# Altium PCB CT310高端控制盒基板电路V1.0.PcbDoc (part 7 of 8)
Units mil, origin at the board's own origin, x right, y up, seen from the top; angles counter-clockwise.
Board outline 8162.61 x 6196.81 mil, 2 copper layers (Top Layer, Bottom Layer), stack 65.792 mil thick; 265 components, 178 nets, 926 pads, 298 vias.
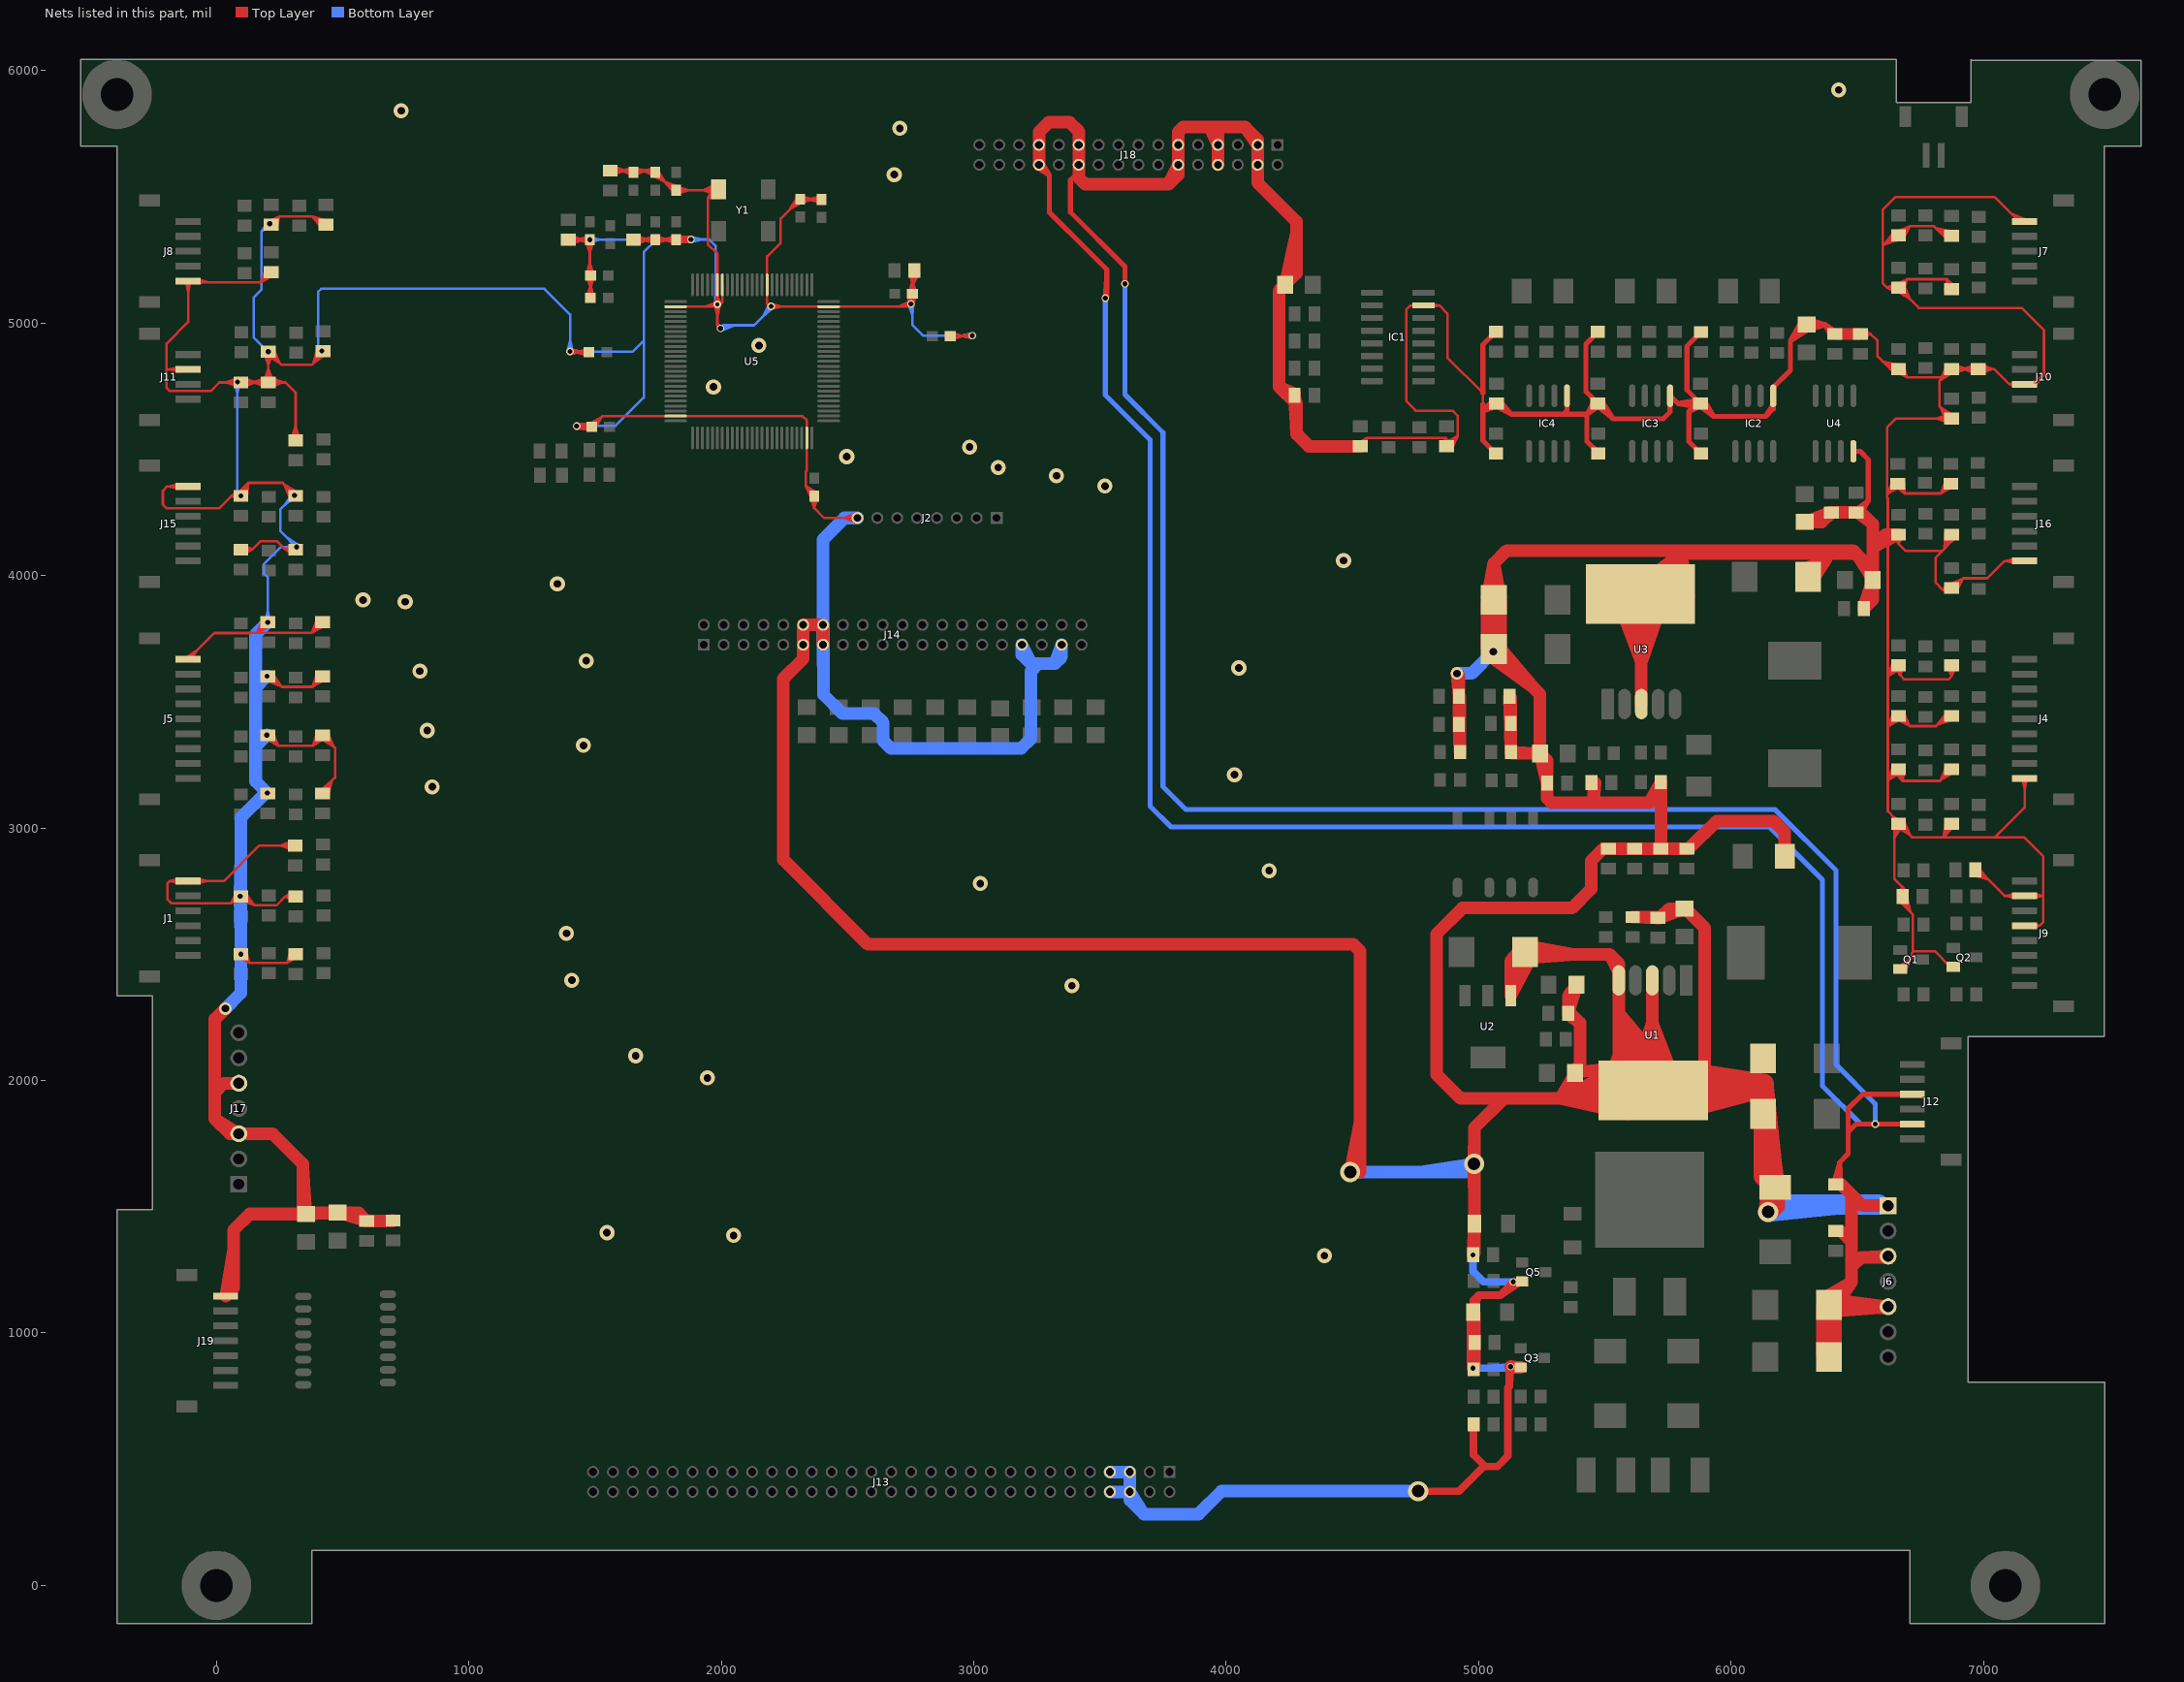
[diagram p7: the nets of this part, all layers, seen from the top]

## Via types
v1: diameter 30, hole 20, Top Layer to Bottom Layer, tented both sides, 226 vias
v2: diameter 60, hole 30, Top Layer to Bottom Layer, tented both sides, 32 vias
v3: diameter 50, hole 30, Top Layer to Bottom Layer, tented both sides, 20 vias
v4: diameter 80, hole 50, Top Layer to Bottom Layer, tented both sides, 10 vias
v5: diameter 50, hole 28, Top Layer to Bottom Layer, tented both sides, 8 vias
v6: diameter 24, hole 16, Top Layer to Bottom Layer, tented both sides, 1 vias
v7: diameter 30, hole 16, Top Layer to Bottom Layer, tented both sides, 1 vias

## Nets (pads, with @x,y where several pads share a name; then routed paths per layer and width w, separated by ;. In a path a pad name is that pad's centre, name@x,y a point inside that pad or via, vN(x,y) a via of type N, cw(c..) or ccw(c..) an arc to the next point about the centre after c; other vN are vias at no path point) (continued)
SGND: C1.2 C2.1 C3.1 C4.2 C5.1 C6.2 C7.2 C8.2 C9.1 C10.1 C11.1 C12.1 C13.1 C14.1 C15.2 C16.2 C17.2 C18.2 C19.2 C20.2 C21.1 C22.1 C23.2 C24.2 C25.2 C26.2 C27.2 C28.2 C29.2 C30.2 C31.2 C32.2 C33.2 C34.2 C35.2 C36.2 C37.2 C38.2 C39.2 C40.2 C41.2 C42.2 C43.2 C44.2 C45.2 C46.2 C47.2 C48.2 C49.2 C50.2 C51.2 C52.2 C53.2 C54.2 C55.2 C56.2 C57.2 C58.2 C59.2 C60.2 C61.2 C62.2 C63.2 C64.2 C65.2 C66.2 C67.2 C68.1 C69.2 C70.2 C71.2 C72.2 C73.2 C74.1 C75.1 C76.2 C77.2 C78.2 C79.1 C80.1 C81.1 C82.1 C83.1 C84.1 C85.2 C86.2 C89.2 C90.2 C91.2 C92.1 C93.1 C94.2 C95.1 C96.2 C97.2 C98.2 C99.1 C100.2 C101.1 C102.2 C103.1 C104.2 C107.2 C109.2 C111.2 C112.1 C113.1 C114.1 C115.1 D4.1 D5.1 D6.1 D7.1 IC1.15 IC2.5 IC3.5 IC4.5 J1.6 J2.8 J4.9 J5.9 J6.1 J6.3 J6.5 J7.1 J8.1 J9.2 J9.4 J10.3 J11.3 J12.3 J12.5 J13.5 J13.6 J13.7 J13.8 J14.11 J14.12 J14.13 J14.14 J14.33 J14.37 J15.6 J16.6 J17.3 J17.5 J18.3 J18.4 J18.7 J18.8 J18.11 J18.12 J18.21 J18.22 J18.25 J18.26 J19.7 Q1.2 Q2.2 Q3.2 Q5.2 R1.2 R3.1 R11.1 R19.1 R27.1 R28.1 R36.2 R37.2 R97.2 R98.1 R99.1 R104.2 R105.2 R106.2 R107.2 R110.2 R113.2 U1.0 U1.3 U1.5 U2.1 U3.0 U3.3 U4.4 U5.10 U5.19 U5.20 U5.27 U5.49 U5.74 U5.99 Y1.2 | length 176280.4
  Top Layer w10: J1.6@-148.39,2781.27 -185.01,2789.99 ; J1.6@-148.39,2798.71 -185.01,2789.99 ; J15.6@-148.25,4344.2 -191.15,4352.93 ; J15.6@-148.25,4361.67 -191.15,4352.93 ; J11.3@-148.25,4807.48 -191.15,4816.22 ; J11.3@-148.25,4824.95 -191.15,4816.22 ; J1.6@-147.37,2789.99 -185.01,2789.99 ; J15.6@-147.37,4352.93 -191.15,4352.93 ; J11.3@-147.37,4816.22 -191.15,4816.22 ; J8.1@-120.67,5165.3 -111.93,5122.41 J8.1@-103.2,5165.3 ; J5.9@-117.57,3675.25 -76.94,3703.51 J5.9@-105.2,3662.88 ; J5.9@-111.93,3668.52 -8.45,3772 134,3772 134.55,3772.55 161.53,3772.55 ; J15.6@-111.93,4352.93 -194.07,4352.93 -212,4335 -212,4281 -197,4266 11,4266 60.6,4315.6 ; J11.3@-111.93,4816.22 -197.22,4816.22 ; J8.1@-76.59,5157.41 -32.54,5161.37 ; J1.6@-76.5,2789.99 -32.72,2789.99 ; J8.1@-76.5,5166.19 -32.54,5161.37 ; J1.6@-75.62,2781.25 -32.72,2789.99 ; J1.6@-75.62,2798.72 -32.72,2789.99 ; J8.1@-74.68,5174.77 -32.54,5161.37 ; C67.2@74.95,4762.75 C67.2@88.19,4746.33 ; C67.2@75.54,4772.34 C67.2@88.19,4783 ; C30.2@76.92,2740.59 57,2701 ; C67.2@83.38,4757.02 38.58,4764.79 ; C67.2@84,4764.67 11.67,4764.67 -22.62,4730.38 -184.38,4730.38 -197.22,4743.22 -197.22,4816.22 ; C30.2@84.54,2726.77 C30.2@94.75,2712.34 ; C30.2@85.37,2735.05 57,2701 ; C67.2@85.4,4757.1 C67.2@103.23,4764.67 ; C67.2@85.59,4776.87 129.97,4764.67 ; C67.2@85.62,4776.87 129.11,4764.67 ; C30.2@85.7,2724.43 C30.2@99.85,2712.31 ; C58.2@85.79,4297.85 60.6,4315.6 ; C58.2@85.79,4333.35 60.6,4315.6 ; C58.2@87.69,4325.86 126,4367 ; C67.2@87.73,4776.28 C67.2@103.23,4764.67 ; C30.2@88.82,2721.44 135.47,2699.06 ; C58.2@88.91,4321.01 120.82,4361.44 ; C58.2@89.07,4321.25 119.86,4357.43 ; C30.2@89.29,2721.18 134.39,2702.76 ; C58.2@89.27,4321.53 121.54,4356.93 ; C58.2@89.31,4321.58 124.06,4359.8 ; C30.2@89.8,2720.92 135.67,2705.2 ; C30.2@90.06,2720.81 139.91,2704.91 ; C58.2@90.21,4307.07 60.6,4315.6 ; C58.2@90.21,4324.14 60.6,4315.6 ; C67.2@90.73,4756.07 37.8,4764.67 ; C67.2@90.73,4773.26 37.8,4764.67 ; C30.2@91.42,2728.92 57,2701 ; C58.2@91.42,4315.6 60.6,4315.6 ; C67.2@91.42,4764.67 37.8,4764.67 ; C28.2@91.53,2485.93 131,2466 ; C67.2@93.99,4766.6 C67.2@88.19,4746.33 ; C67.2@93.99,4767.51 C67.2@88.19,4783 ; C30.2@94,2728.92 84.92,2728.92 57,2701 ; C58.2@95.64,4319.69 126,4367 ; C30.2@95.78,2720.16 C30.2@116.08,2728.92 ; C30.2@96.18,2721.72 57,2701 ; C30.2@96.74,2739.62 C30.2@116.08,2728.92 ; C28.2@97.08,2494.37 131,2466 ; C30.2@97.33,2728.92 C30.2@116.08,2728.92 ; C52.2@97.33,4102.6 141.99,4102.6 ; C58.2@97.33,4338.33 126,4367 ; C67.2@97.33,4764.67 C69.2@205.65,4764.67 ; C30.2@98.67,2721.6 151,2694 ; C30.2@99.61,2738.28 139.91,2704.91 ; C30.2@99.97,2738.02 135.67,2705.2 ; C30.2@100.41,2737.67 134.39,2702.76 ; C30.2@100.73,2737.4 135.47,2699.06 ; C28.2@103.23,2500.42 131,2466 ; C30.2@103.23,2728.92 151,2694 ; C52.2@103.23,4102.6 141.99,4102.6 ; C58.2@103.23,4315.6 126,4367 ; C30.2@103.7,2727.58 C30.2@94.75,2712.34 ; C67.2@103.92,4756.07 156.85,4764.67 ; C67.2@103.92,4773.26 156.85,4764.67 ; C30.2@103.99,2730.48 C30.2@99.85,2712.31 ; C52.2@104.19,4094.03 141.99,4102.6 ; C52.2@104.19,4111.17 141.99,4102.6 ; C58.2@106.34,4311.28 124.06,4359.8 ; C58.2@106.43,4311.48 121.54,4356.93 ; C67.2@106.46,4746.33 156.85,4764.67 ; C67.2@106.46,4783 156.85,4764.67 ; C58.2@106.58,4311.81 119.86,4357.43 ; C58.2@106.63,4311.93 120.82,4361.44 ; C52.2@107.7,4084.52 141.99,4102.6 ; C52.2@107.7,4120.68 141.99,4102.6 ; C30.2@108.81,2735.49 151,2694 ; C28.2@110.44,2505.15 131,2466 ; C58.2@111.36,4312.73 126,4367 ; C30.2@116.45,2742.03 151,2694 ; C28.2@119.86,2508.79 131,2466 ; C58.2@121.27,4310.98 126,4367 ; C47.2@181.79,3824.27 161.53,3772.55 ; C69.2@187.31,4767.9 205.65,4818.29 ; C46.2@190.15,3366.27 C46.2@197.69,3352.25 ; C47.2@190.79,3819.76 161.53,3772.55 ; C39.2@191.28,3598.67 C39.2@200.02,3583.67 ; C46.2@193.51,3360.39 237.54,3329.42 ; C46.2@193.76,3360.19 236.52,3332.42 ; C46.2@193.91,3360.07 236.99,3333.26 ; C46.2@194.02,3359.99 238.18,3333.24 ; C46.2@194.12,3359.91 240.87,3332.13 ; C39.2@195.27,3592.81 241.07,3566.85 ; C24.2@195.68,4886.09 204.54,4840.15 ; C62.2@195.69,5211.37 177.09,5161.37 ; C39.2@195.73,3592.5 240.13,3570.88 ; C24.2@195.73,4885.62 206.76,4840.15 ; C47.2@195.8,3820.86 166.22,3775.26 ; C47.2@195.85,3820.92 167.59,3777.71 ; C47.2@195.92,3821.01 167.44,3778.45 C47.2@210,3806.94 ; C47.2@196,3821.11 166.75,3778.62 ; C47.2@196.1,3821.23 164.34,3777.08 ; C39.2@196.25,3592.2 241.62,3573.4 ; C39.2@196.51,3592.07 244.44,3573.56 ; C69.2@196.51,4746.33 146.12,4764.67 ; C69.2@196.51,4783 146.12,4764.67 ; C39.2@196.56,3592.04 245.7,3573.29 ; C69.2@197.06,4765.36 205.65,4818.29 ; C24.2@197.06,4886.23 205.65,4833.3 ; C47.2@197.74,3814.67 161.53,3772.55 ; C24.2@198.95,4879.5 242.62,4846.82 ; C69.2@199.05,4756.07 146.12,4764.67 ; C69.2@199.05,4773.26 146.12,4764.67 ; C24.2@199.16,4879.31 241.55,4849.78 ; C24.2@199.3,4879.2 241.86,4850.71 C24.2@213.38,4893.27 ; C24.2@199.42,4879.1 242.72,4851.03 ; C24.2@199.53,4879.01 245.58,4849.75 ; C24.2@199.58,4872.66 250.48,4842.09 ; C69.2@199.74,4764.67 146.12,4764.67 ; C46.2@200.8,3377.97 C46.2@216.52,3371.69 ; C24.2@201.33,4895.95 C24.2@187.31,4883.69 ; C39.2@203.13,3591.23 C39.2@218.33,3599.67 ; C46.2@203.47,3360.49 245.25,3325 ; C46.2@203.65,3366.6 245.25,3325 ; C47.2@203.83,3808.55 161.53,3772.55 ; C39.2@204.56,3592.64 258.13,3559.87 ; C39.2@204.6,3610.33 C39.2@218.33,3599.67 ; C24.2@204.68,4876.97 C24.2@187.31,4883.69 ; C62.2@204.76,5206.98 177.09,5161.37 ; C46.2@204.96,3359.32 C46.2@216.52,3371.69 ; C24.2@205.47,4880.81 250.48,4842.09 ; C24.2@206.62,4876.97 C24.2@223.99,4883.69 ; C39.2@207.05,3608.96 245.7,3573.29 ; C39.2@207.14,3608.89 244.44,3573.56 ; C46.2@207.26,3374.88 240.87,3332.13 ; C46.2@207.42,3374.71 238.18,3333.24 ; C39.2@207.43,3608.66 241.62,3573.4 ; C46.2@207.53,3374.58 236.99,3333.26 ; C46.2@207.65,3374.44 236.52,3332.42 ; C46.2@207.78,3374.28 237.54,3329.42 ; C39.2@207.87,3608.27 240.13,3570.88 ; C39.2@208.18,3607.96 241.07,3566.85 ; C46.2@208.94,3363.51 C46.2@197.69,3352.25 ; C46.2@209.55,3366.6 245.25,3325 ; C39.2@209.55,3599.67 258.13,3559.87 ; C47.2@209.63,3800.33 161.53,3772.55 ; C47.2@209.87,3806.83 164.34,3777.08 ; C47.2@209.91,3806.87 166.75,3778.62 ; C24.2@209.97,4895.95 C24.2@223.99,4883.69 ; C47.2@210.1,3807.02 167.59,3777.71 ; C47.2@210.24,3807.14 166.22,3775.26 ; C39.2@210.4,3597.58 C39.2@200.02,3583.67 ; C69.2@211.55,4764.67 265.18,4764.67 ; C24.2@211.55,4886.93 250.48,4842.09 ; C62.2@211.74,5201.93 177.09,5161.37 ; C59.2@212.1,5404.61 250.33,5422.61 ; C69.2@212.25,4756.07 265.18,4764.67 ; C69.2@212.25,4773.26 265.18,4764.67 ; C24.2@213.11,4893.59 245.58,4849.75 ; C24.2@213.27,4893.4 242.72,4851.03 ; C24.2@213.48,4893.15 241.55,4849.78 ; C24.2@213.59,4893 242.62,4846.82 ; C69.2@214.24,4765.36 205.65,4818.29 ; C24.2@214.24,4886.23 205.65,4833.3 ; C69.2@214.79,4746.33 265.18,4764.67 ; C69.2@214.79,4783 265.18,4764.67 ; C39.2@215.46,3605.94 258.13,3559.87 ; C24.2@215.56,4885.62 204.54,4840.15 ; C24.2@215.61,4886.09 206.76,4840.15 ; C59.2@217.48,5396.04 250.33,5422.61 ; C62.2@217.65,5201.93 177.09,5161.37 ; C59.2@217.65,5389.93 250.33,5422.61 ; C62.2@217.83,5195.81 177.09,5161.37 ; C24.2@218.46,4892.09 250.48,4842.09 ; C39.2@223.36,3612.16 258.13,3559.87 ; C62.2@223.57,5187.54 177.09,5161.37 ; C59.2@223.55,5389.93 250.33,5422.61 ; C69.2@223.99,4767.9 205.65,4818.29 ; C46.2@225.54,3376.15 245.25,3325 ; C24.2@227.36,4896.78 250.48,4842.09 ; C59.2@230.75,5385.17 250.33,5422.61 ; C59.2@240.21,5381.59 250.33,5422.61 ; C27.2@291.57,2509.05 279.56,2466 ; C61.2@295.64,4538.33 313.97,4588.72 ; C55.2@300.88,4311.16 273.41,4357.87 ; C27.2@300.93,2505.25 279.56,2466 ; C55.2@300.9,4311.14 275.09,4355.32 ; C55.2@300.96,4311.06 275.06,4354.52 ; C55.2@301.03,4310.97 274.75,4353.98 ; C55.2@301.16,4310.44 269.14,4360.44 ; C55.2@301.16,4310.79 272.92,4354.53 ; C55.2@301.21,4310.73 270.78,4356.54 ; C55.2@301.54,4323.66 C55.2@292.26,4305.75 ; C31.2@302.84,2912.33 252.45,2930.67 ; C31.2@302.84,2949 252.45,2930.67 ; C29.2@303.09,2710.97 273.25,2728.92 ; C29.2@303.09,2746.86 273.25,2728.92 ; C49.2@303.09,4084.66 273.25,4102.6 ; C49.2@303.09,4120.55 273.25,4102.6 ; C31.2@305.38,2922.07 252.45,2930.67 ; C31.2@305.38,2939.26 252.45,2930.67 ; C61.2@305.38,4535.79 313.97,4588.72 ; C31.2@306.07,2930.67 252.45,2930.67 ; C29.2@307,2720.36 273.25,2728.92 ; C29.2@307,2737.47 273.25,2728.92 ; C49.2@307,4094.05 273.25,4102.6 ; C49.2@307,4111.16 273.25,4102.6 ; C27.2@308.07,2500.42 279.56,2466 ; C29.2@308.07,2728.92 273.25,2728.92 ; C49.2@308.07,4102.6 273.25,4102.6 ; C55.2@308.07,4315.6 269.14,4360.44 ; C55.2@310.79,4318.79 262.57,4367 126,4367 ; C31.2@311.97,2930.67 170.67,2930.67 29.99,2789.99 J1.6@-111.93,2789.99 -185.01,2789.99 ; C55.2@312.35,4307.58 C55.2@292.26,4305.75 ; C27.2@313.97,2500.42 279.56,2466 ; C29.2@313.97,2728.92 273.25,2728.92 ; C49.2@313.97,4102.6 273.25,4102.6 ; C61.2@313.97,4535.1 313.97,4724.03 273.33,4764.67 C69.2@205.65,4764.67 ; C27.2@314.15,2494.3 279.56,2466 ; C55.2@314.15,4321.71 269.14,4360.44 ; C55.2@315.63,4324.49 274.75,4353.98 ; C55.2@315.72,4324.41 275.06,4354.52 ; C55.2@315.81,4324.33 275.09,4355.32 ; C55.2@315.9,4324.23 273.41,4357.87 ; C27.2@319.62,2485.81 279.56,2466 ; C55.2@320.04,4329.87 269.14,4360.44 ; C61.2@322.57,4535.79 313.97,4588.72 ; C61.2@332.31,4538.33 313.97,4588.72 ; C42.2@397.91,3375.27 382,3325 ; C35.2@398.34,3609.12 379.63,3559 ; C43.2@398.43,3824.27 378.18,3772.55 ; C42.2@407.18,3371.33 382,3325 ; C35.2@407.41,3604.72 379.63,3559 ; C43.2@407.44,3819.76 378.18,3772.55 ; C26.2@408.96,4892.3 383.5,4840.5 ; C26.2@409.19,4893.73 389.52,4846.52 ; C26.2@409.31,4893.95 389.83,4849.62 ; C26.2@409.47,4894.22 387.62,4848.89 ; C26.2@409.57,4894.37 385.43,4847.17 ; C34.2@412.03,3148.68 456.37,3186.37 ; C26.2@412.22,4880.84 C26.2@399.58,4895.93 ; C42.2@414.23,3352.34 465.13,3321.77 ; C42.2@414.39,3366.6 382,3325 ; C35.2@414.39,3599.67 379.63,3559 ; C43.2@414.39,3814.67 378.18,3772.55 ; C56.2@415.58,5376.41 380.39,5422.61 ; C26.2@416.39,4887.93 383.5,4840.5 ; C26.2@419.03,4898.95 C26.2@399.58,4895.93 ; C34.2@419.18,3141.61 456.37,3186.37 ; C42.2@420.12,3360.49 465.13,3321.77 ; C34.2@420.3,3136.6 420.3,3150.3 470,3200 470,3316.9 C42.2@420.3,3366.6 420.3,3363.3 382,3325 ; C35.2@420.3,3599.67 379.63,3559 ; C43.2@420.3,3814.67 378.18,3772.55 ; C35.2@420.47,3593.55 379.63,3559 ; C43.2@420.47,3808.55 378.18,3772.55 ; C42.2@420.74,3360.77 382,3325 ; C26.2@422.3,4879.3 377,4834 258.57,4834 v1(205.65,4886.93) ; C56.2@423.02,5383.18 380.39,5422.61 ; C26.2@423.09,4882.5 383.5,4840.5 ; C26.2@425.28,4882.14 385.43,4847.17 ; C26.2@425.33,4882.2 387.62,4848.89 ; C26.2@425.49,4882.37 389.83,4849.62 ; C26.2@425.7,4882.62 390.23,4847.64 ; C26.2@425.72,4882.65 389.52,4846.52 ; C26.2@425.79,4882.73 388.22,4844.02 ; C34.2@426.2,3136.6 456.37,3186.37 ; C42.2@426.2,3366.6 465.13,3321.77 ; C35.2@426.22,3585.29 379.63,3559 ; C43.2@426.28,3800.33 378.18,3772.55 ; C42.2@426.83,3352.75 382,3325 ; C56.2@428.39,5389.93 380.39,5422.61 ; C26.2@429.78,4874.98 383.5,4840.5 ; C56.2@432.7,5397.39 380.39,5422.61 ; C42.2@433.1,3371.77 465.13,3321.77 ; C34.2@433.88,3132.69 456.37,3186.37 ; C56.2@434.3,5389.93 413.07,5389.93 380.39,5422.61 ; C56.2@436.27,5406.8 380.39,5422.61 ; C42.2@442,3376.46 465.13,3321.77 ; C34.2@443.46,3129.62 456.37,3186.37 ; C95.1@1393.3,5329.92 v1(1479.3,5329.92) ; C95.1@1399.2,5329.92 1452.82,5329.92 ; C95.1@1399.89,5321.33 1452.82,5329.92 ; C95.1@1399.89,5338.52 1452.82,5329.92 ; v1@1401.51,4877.01 1446.15,4884.29 ; C95.1@1402.43,5311.58 1452.82,5329.92 ; C95.1@1402.43,5348.26 1452.82,5329.92 ; v1@1402.7,4896.85 1446.15,4884.29 ; v1@1425.09,4582.18 C102.2@1470.65,4578.43 ; v1@1426.19,4601.97 C102.2@1472.47,4600.71 ; v1@1429.93,4582.44 C102.2@1472.47,4600.71 ; v1@1430.99,4601.17 C102.2@1470.65,4578.43 ; C92.1@1464.77,5325.79 1479.3,5278.27 ; C104.2@1467.25,5101.49 1481.86,5148.98 ; C97.2@1467.25,5189.71 1479.3,5238.12 ; C97.2@1467.34,5186.13 1481.86,5138.61 C97.2@1496.39,5186.13 ; R97.2@1471.72,4869.77 1424.21,4884.29 ; R97.2@1471.72,4898.82 1424.21,4884.29 ; R97.2@1473.89,4884.29 1424.21,4884.29 ; R97.2@1475.86,4884.29 1400.29,4884.29 1401,4885 v1(1401,4887) 1446.15,4884.29 ; C92.1@1477.13,5315.4 1429.61,5329.92 ; C92.1@1477.13,5344.45 1429.61,5329.92 ; C92.1@1478.27,5319.98 1429.9,5330.01 ; C92.1@1478.27,5339.87 1429.9,5329.84 ; C92.1@1478.3,5319.97 1429.9,5329.84 ; C92.1@1478.3,5339.88 1429.9,5330.01 ; C92.1@1479.3,5327.96 1479.3,5278.27 ; C102.2@1479.51,4600.72 1527.67,4630.19 ; C102.2@1482.63,4574.77 v1@1435.11,4589.29 ; C102.2@1482.63,4603.82 v1@1435.11,4589.29 ; C102.2@1484.8,4589.29 v1@1435.11,4589.29 ; C102.2@1488.74,4589.29 1527.67,4630.19 ; C92.1@1493.82,5325.79 1479.3,5278.27 ; C104.2@1496.3,5101.44 1481.86,5148.98 ; C97.2@1496.26,5191.2 1479.3,5238.12 ; C102.2@1500.6,4580.64 1527.67,4630.19 ; C90.2@1560.3,5604.6 1730.42,5604.6 C94.2@1738.3,5596.73 ; C90.2@1565.91,5603.37 1619.55,5604.6 ; C90.2@1566.4,5611.98 1619.55,5604.6 ; C90.2@1566.8,5594.79 1619.55,5604.6 ; C90.2@1568.72,5621.78 1619.55,5604.6 ; C90.2@1569.56,5585.11 1619.55,5604.6 ; C91.2@1648.58,5584.51 1601.72,5604.6 ; C91.2@1651.94,5613.38 1601.72,5604.6 ; C99.1@1652.36,5329.92 C103.1@1821.3,5329.92 ; C91.2@1652.78,5613.38 1702.91,5604.6 ; C91.2@1656.15,5584.51 1702.91,5604.6 ; C99.1@1658.26,5329.92 1711.89,5329.92 ; C99.1@1658.96,5321.33 1711.89,5329.92 ; C99.1@1658.96,5338.52 1711.89,5329.92 ; C99.1@1661.5,5311.58 1711.89,5329.92 ; C99.1@1661.5,5348.26 1711.89,5329.92 ; C94.2@1729.64,5582.9 1779.19,5555.83 ; C94.2@1734.06,5582.67 1686.69,5604.6 ; C101.1@1736.13,5315.4 1688.61,5329.92 C101.1@1736.13,5344.45 ; C94.2@1738.3,5594.76 1779.19,5555.83 ; C94.2@1738.45,5611.41 1686.69,5604.6 ; C101.1@1740.47,5315.4 1787.98,5329.92 C101.1@1740.47,5344.45 ; 1744.15,4631.76 U5.49@1779.9,4631.76 ; C94.2@1749.72,5603.99 1779.19,5555.83 ; C93.1@1811.41,5516.97 1774.92,5560.1 ; U5.27@1819.15,5064.83 1983.83,5064.83 v7@1984.5,5065.5 ; C103.1@1819.13,5315.4 1771.61,5329.92 ; C103.1@1819.13,5344.45 1771.61,5329.92 ; C93.1@1821.29,5527.83 1774.92,5560.1 ; C103.1@1823.47,5315.4 1870.98,5329.92 C103.1@1823.47,5344.45 ; C93.1@1823.46,5511.34 1870.98,5525.86 C93.1@1823.46,5540.39 ; C93.1@1828.05,5540.87 1774.92,5560.1 ; U5.49@1858.4,4631.76 1894.15,4631.76 ; U5.27@1858.4,5064.83 1894.15,5064.83 ; v1@1876.37,5340.32 C103.1@1835.86,5319.19 ; v1@1876.8,5321.53 C103.1@1835.05,5340.91 ; v1@1878.65,5340.91 C103.1@1834.98,5329.92 ; v1@1879.13,5321.04 C103.1@1834.98,5329.92 ; v1@1881.08,5340.94 C103.1@1835.05,5340.91 ; v1@1881.51,5321.11 C103.1@1835.86,5319.19 ; Y1.2@1971.89,5536.83 1946.34,5495.34 ; v7@1974.56,5072.18 1984.5,5028.3 ; v7@1974.58,5074.58 U5.20@1984.5,5112.19 ; Y1.2@1979.97,5530.61 1946.34,5495.34 ; v7@1981.31,5082.77 2004.19,5085.19 ; v7@1981.7,5082.9 1937.56,5064.83 ; Y1.2@1982.59,5552.68 1929.22,5525.86 ; v7@1984.5,5076.44 U5.20@1984.5,5112.19 ; U5.20@1984.5,5190.69 1984.5,5226.44 ; Y1.2@1985.09,5504.74 1929.22,5525.86 ; v7@1985.23,5063.32 1937.56,5064.83 ; Y1.2@1986.36,5543.28 1929.22,5525.86 ; v1@1987.81,4975.07 1984.5,4995.5 ; Y1.2@1987.86,5514.48 1929.22,5525.86 ; Y1.2@1988.87,5519.13 1946.34,5495.34 ; v7@1991.41,5066.06 2004.19,5085.19 ; Y1.2@1993.99,5505.54 1946.34,5495.34 ; v7@1994.44,5072.18 1984.5,5028.3 ; v7@1994.42,5074.58 U5.20@1984.5,5112.19 ; Y1.2@1995.07,5495.4 1946.34,5495.34 ; v1@2003.28,4986.79 1984.5,4995.5 ; U5.19@2004.19,5112.19 2004.19,5085.19 ; U5.19@2004.19,5151.44 2004.19,5085.19 ; U5.10@2181.35,5112.19 2181.35,5078 ; U5.10@2181.35,5190.69 2181.35,5226.44 ; v1@2194.52,5064.83 2181.35,5078 ; v1@2197,5064.83 U5.99@2425.44,5064.83 2739.83,5064.83 v1(2751,5076) ; v1@2197.85,5056.04 2242.04,5064.83 ; v1@2198.37,5075.91 2242.04,5064.83 ; R99.1@2300.87,5497.99 2271.4,5449.83 ; R99.1@2312.3,5488.76 2271.4,5449.83 ; R99.1@2314.09,5476.15 2362.01,5489.43 ; R99.1@2314.84,5505.19 2362.01,5489.43 ; R99.1@2320.95,5476.9 2271.4,5449.83 ; 2338.83,4470.15 U5.74@2338.83,4505.9 ; U5.74@2338.83,4584.4 2338.83,4614 ; 2350.44,5064.83 U5.99@2386.19,5064.83 ; C100.2@2353.51,4310.23 2368,4267 ; C100.2@2355.56,4308.74 2335.32,4354.88 ; C100.2@2368,4312.6 2368,4267 ; C100.2@2368,4316.54 2335.32,4354.88 ; C100.2@2377.67,4327.59 2335.32,4354.88 ; C100.2@2382.49,4310.23 2368,4267 ; C89.2@2394.83,5474.91 2347.32,5489.43 C89.2@2394.83,5503.96 ; C89.2@2397,5489.43 2313.59,5489.43 R99.1@2312.3,5490.73 ; U5.99@2464.69,5064.83 2500.44,5064.83 ; J2.8@2536.17,4209.66 2485.79,4228 ; J2.8@2536.17,4246.34 2485.79,4228 ; J2.8@2538.72,4219.41 2485.79,4228 ; J2.8@2538.72,4236.59 2485.79,4228 ; J2.8@2539.41,4228 2407,4228 2368,4267 ; v1@2741.02,5075.39 C98.2@2743.82,5111.32 ; v1@2741.07,5074.83 C98.2@2741.05,5117.7 ; v1@2741.28,5078.37 C98.2@2755.67,5116.29 ; v1@2741.41,5078.82 C98.2@2757.63,5116.29 ; v1@2742.86,5081.81 C98.2@2768.5,5109.16 ; v1@2743.03,5082.03 C98.2@2771.45,5111.32 ; C98.2@2743.11,5118.46 2757.63,5165.98 C98.2@2772.16,5118.46 ; C96.2@2746.76,5201.55 2757.63,5147.92 ; v1@2747.78,5085.47 2702.6,5064.83 ; v1@2752.26,5066.08 2702.6,5064.83 ; C96.2@2756.77,5202.64 2757.63,5147.92 ; v1@2760.2,5072.09 C98.2@2771.45,5111.32 ; v1@2760.39,5072.55 C98.2@2768.5,5109.16 ; v1@2760.39,5079.44 C98.2@2741.05,5117.7 ; v1@2760.43,5079.33 C98.2@2743.82,5111.32 ; v1@2760.99,5075.6 C98.2@2757.63,5116.29 ; v1@2761,5076.08 C98.2@2755.67,5116.29 ; C96.2@2765.37,5202.09 2757.63,5147.92 ; C96.2@2765.51,5203 2757.63,5203 C98.2@2757.63,5116.29 ; C96.2@2773.78,5200.21 2757.63,5147.92 ; C96.2@2783.09,5196.36 2757.63,5147.92 ; R98.1@2906.43,4948.29 2993.29,4948.29 2995,4950 v1(2994,4950) 2948.93,4948.29 ; R98.1@2908.4,4948.29 2958.09,4948.29 ; R98.1@2910.57,4933.77 2958.09,4948.29 ; R98.1@2910.57,4962.82 2958.09,4948.29 ; v1@2992.52,4959.89 2948.93,4948.29 ; v1@2993.27,4940.03 2948.93,4948.29 ; C109.2@4523.99,4524.99 4556.55,4544.55 ; C109.2@4530.33,4517.07 4556.55,4544.55 ; C109.2@4531.3,4511.86 4531.3,4519.3 4556.55,4544.55 ; C109.2@4537.2,4511.86 4556.55,4544.55 ; C109.2@4545.07,4508.34 4556.55,4544.55 ; C109.2@4555.06,4506.59 4556.55,4544.55 ; IC1.15@4748.99,5062.59 4730.3,5069.3 ; IC1.15@4748.99,5076.01 4730.3,5069.3 ; IC1.15@4750.16,5069.3 4730.3,5069.3 ; IC1.15@4813.15,5069.3 4844.7,5069.3 ; IC1.15@4813.89,5062.52 4844.7,5069.3 ; IC1.15@4813.89,5076.07 4844.7,5069.3 ; C111.2@4855,4515.35 4870.04,4544.55 ; C111.2@4864.68,4512.14 4870.04,4544.55 ; C111.2@4867.78,4526.57 4917,4553 ; C111.2@4873.32,4518.17 4917,4553 ; C111.2@4879.2,4511.86 4917,4553 ; C111.2@4881.69,4513.83 4870.04,4544.55 ; C111.2@4885.98,4506.53 4917,4553 ; C111.2@4890.54,4518.88 4870.04,4544.55 ; C111.2@4894.82,4501.72 4917,4553 ; 5017.02,4678 5017.02,4721.98 4876,4863 4876,5038 4844.7,5069.3 ; C83.1@6512.7,4956.45 6552.55,4956.45 ; C83.1@6518.61,4956.45 6552.55,4956.45 ; C83.1@6519.71,4947.9 6552.55,4956.45 ; C83.1@6519.71,4965 6552.55,4956.45 ; C83.1@6523.72,4938.54 6552.55,4956.45 ; C83.1@6523.72,4974.36 6552.55,4956.45 ; 6620.77,4161.49 6620.77,4305 6617.77,4308 6617.77,4585.77 6653.99,4621.99 C25.2@6873.32,4621.99 6825.3,4670.01 6825.3,4769.97 C78.2@6873.32,4817.99 ; C48.2@6638.27,4372.68 6620.77,4323.83 ; C33.2@6641.36,3242.34 6620.77,3189.23 ; C40.2@6641.46,3453.5 6620.77,3401.33 ; C32.2@6641.46,3653.5 6620.77,3601.33 ; C54.2@6641.46,4171.13 6620.77,4118.96 ; C66.2@6644.42,5360.29 6606.14,5310.14 ; C41.2@6644.83,3019.28 6646.3,2958.8 ; C54.2@6645.3,4156.7 6663.3,4125.29 ; C23.2@6646.45,4802.92 6599.49,4848.51 ; C48.2@6647.38,4368.38 6620.77,4323.83 ; C33.2@6650.39,3237.89 6620.77,3189.23 ; C40.2@6650.45,3448.97 6620.77,3401.33 ; C32.2@6650.45,3648.97 6620.77,3601.33 ; C54.2@6650.45,4166.6 6620.77,4118.96 ; C32.2@6651.06,3639.68 6668.3,3606.3 ; C66.2@6651.9,5353.57 6606.14,5310.14 ; C33.2@6652.12,3225.44 6679.3,3186.3 ; C48.2@6652.1,4351.19 6687,4325 ; C23.2@6652.88,4810.64 6599.49,4848.51 ; C71.2@6652.98,5121.83 6618.07,5139.93 ; C71.2@6652.98,5158.02 6618.07,5139.93 ; C48.2@6654.39,4363.36 6620.77,4323.83 ; C54.2@6654.74,4160.46 6663.3,4125.29 ; C41.2@6654.87,3018.69 6646.3,2958.8 ; C71.2@6656.44,5131.36 6618.07,5139.93 ; C71.2@6656.44,5148.5 6618.07,5139.93 ; C71.2@6657.19,5125.69 6707.99,5095.01 ; C41.2@6657.23,3002.6 6708.13,2972.03 ; C40.2@6657.39,3443.86 6620.77,3401.33 ; C32.2@6657.39,3643.86 6620.77,3601.33 ; C54.2@6657.39,4161.49 6620.77,4118.96 ; C71.2@6657.39,5139.93 6618.07,5139.93 ; C66.2@6657.39,5346.93 6606.14,5310.14 ; C71.2@6657.69,5154.57 6696.92,5173.55 ; C23.2@6657.75,4803.3 6695.98,4785.3 ; C40.2@6657.95,3429.02 6707.29,3403.3 ; C66.2@6658.9,5362.44 6707.55,5383.55 ; C48.2@6659.06,4358.52 6687,4325 ; C48.2@6660.47,4357.25 6620.77,4323.83 ; C32.2@6660.62,3643.08 6668.3,3606.3 ; C23.2@6660.9,4825.86 6599.49,4848.51 ; C33.2@6660.98,3230.28 6679.3,3186.3 ; C63.2@6661.15,2739.54 6678.99,2766.67 ; C66.2@6661.93,5339.59 6606.14,5310.14 ; C41.2@6663.12,3010.75 6708.13,2972.03 ; C23.2@6663.12,4811.87 6695.98,4785.3 ; C71.2@6663.1,5133.83 6707.99,5095.01 ; C71.2@6663.12,5146.04 6696.92,5173.55 ; C33.2@6663.3,3232.86 6663.3,3231.76 C33.2@6658.3,3226.76 ; C32.2@6663.3,3643.86 6620.77,3601.33 ; C40.2@6663.39,3437.49 6707.29,3403.3 ; C40.2@6663.47,3437.75 6620.77,3401.33 ; C32.2@6663.47,3637.75 6620.77,3601.33 ; C54.2@6663.47,4155.38 6620.77,4118.96 ; C33.2@6663.56,3226.83 6620.77,3189.23 ; C23.2@6663.64,4835.53 6599.49,4848.51 ; C66.2@6663.77,5353.62 6707.55,5383.55 ; C63.2@6664.3,2710.95 6710.09,2667.31 ; C66.2@6665.9,5330.36 6606.14,5310.14 ; C48.2@6666.18,4348.94 6620.77,4323.83 ; C48.2@6666.2,4363.36 6687,4325 ; Q1.2@6668,2452.63 6711.04,2482.79 ; C32.2@6668.3,3640.3 6668.3,3606.3 ; C41.2@6669.2,3016.86 6708.13,2972.03 ; C33.2@6669.2,3232.86 6679.3,3186.3 ; C40.2@6669.2,3443.86 6707.29,3403.3 ; C32.2@6669.2,3643.86 6668.3,3606.3 ; C23.2@6669.2,4817.99 6695.98,4785.3 ; C66.2@6669.2,5346.93 6707.55,5383.55 ; C40.2@6669.29,3429.54 6620.77,3401.33 ; C32.2@6669.29,3629.54 6620.77,3601.33 ; C54.2@6669.29,4147.16 6620.77,4118.96 ; C33.2@6669.51,3218.72 6620.77,3189.23 ; Q1.2@6670.15,2441.89 6716.2,2487.95 6716.2,2504.36 6719.55,2507.71 ; C63.2@6670.44,2735.35 6678.99,2766.67 ; C41.2@6671.38,3013.86 6646.3,2958.8 ; C63.2@6671.79,2717.65 6710.09,2667.31 ; C54.2@6671.86,4160.46 6663.3,4125.29 ; C48.2@6674.15,4366.7 6687,4325 ; C66.2@6675.64,5341.2 6707.55,5383.55 ; C40.2@6675.93,3449.26 6707.29,3403.3 ; C41.2@6676.11,3022.03 6708.13,2972.03 ; C71.2@6676.12,5145.07 6707.99,5095.01 ; C23.2@6676.39,4822.74 6695.98,4785.3 ; C71.2@6676.36,5135.13 6696.92,5173.55 ; C32.2@6677.74,3642.67 6668.3,3606.3 ; C33.2@6677.76,3233.92 6679.3,3186.3 ; Q1.2@6678.02,2441.89 6711.04,2482.79 ; C63.2@6678.99,2734.2 6678.99,2766.67 ; C41.2@6680.15,3008.94 6646.3,2958.8 ; C54.2@6681.29,4156.7 6663.3,4125.29 ; C48.2@6684.09,4368.54 6687,4325 ; C66.2@6684.23,5335.93 6707.55,5383.55 ; C40.2@6684.72,3454.16 6707.29,3403.3 ; C41.2@6685,3026.71 6708.13,2972.03 ; C71.2@6685.03,5149.73 6707.99,5095.01 ; C71.2@6685.77,5131.42 6696.92,5173.55 ; C23.2@6685.85,4826.33 6695.98,4785.3 ; C63.2@6686.77,2726.11 6710.09,2667.31 ; C32.2@6687.13,3638.81 6668.3,3606.3 ; C63.2@6687.53,2735.35 6678.99,2766.67 ; C33.2@6687.82,3233.17 6679.3,3186.3 ; Q1.2@6690.62,2434.36 6711.04,2482.79 ; C63.2@6696.37,2729.06 6710.09,2667.31 ; C63.2@6696.83,2739.54 6678.99,2766.67 ; C51.2@6848.21,4372.54 6831.96,4325 ; C50.2@6848.83,5132.64 6855.3,5174.3 ; C57.2@6849.26,4165.65 6845.18,4106.18 ; C45.2@6849.61,3022.34 6841.58,2964.58 ; C78.2@6850.76,4826.33 6840.63,4785.3 ; C37.2@6851.61,3242.71 6828.48,3188.03 ; C25.2@6851.61,4612.14 6828.48,4666.82 ; C78.2@6851.61,4827.84 6828.48,4773.15 ; C44.2@6854.61,3457.38 6815.85,3407.85 ; C36.2@6855.15,3639.79 6873.32,3601.32 ; C64.2@6856.41,5330.9 6811.31,5375.46 ; C60.2@6857.15,3966.4 6838.6,3942.99 ; C51.2@6857.37,4368.34 6831.96,4325 ; C50.2@6858.94,5132.3 6855.3,5174.3 ; C57.2@6859.2,4164.12 6845.18,4106.18 ; C45.2@6859.42,3020.1 6841.58,2964.58 ; C78.2@6860.22,4822.74 6840.63,4785.3 ; C37.2@6860.51,3238.03 6828.48,3188.03 ; C25.2@6860.51,4616.82 6828.48,4666.82 ; C78.2@6860.51,4823.15 6828.48,4773.15 ; C44.2@6862,3450.57 6815.85,3407.85 ; C64.2@6862.89,5338.59 6811.31,5375.46 ; C60.2@6863.96,3958.76 6838.6,3942.99 ; C25.2@6864.18,4603.65 6813.79,4621.99 ; C25.2@6864.18,4640.33 6813.79,4621.99 ; C51.2@6864.41,4363.36 6831.96,4325 ; C36.2@6864.74,3642.99 6873.32,3601.32 ; C60.2@6866.47,3932.26 6838.6,3942.99 ; C25.2@6866.72,4613.39 6813.79,4621.99 ; C25.2@6866.72,4630.58 6813.79,4621.99 ; C45.2@6867.41,3016.86 6841.58,2964.58 ; C37.2@6867.41,3232.86 6828.48,3188.03 ; C44.2@6867.41,3443.86 6815.85,3407.85 ; C60.2@6867.41,3950.86 6838.6,3942.99 ; C57.2@6867.41,4161.49 6845.18,4106.18 ; C50.2@6867.41,5133.93 6855.3,5174.3 ; C60.2@6868.46,3942.3 6838.6,3942.99 ; C60.2@6868.84,3966.32 6919.37,3989.04 ; C51.2@6870.32,4363.36 6831.96,4325 ; C51.2@6870.49,4357.24 6831.96,4325 ; C64.2@6870.9,5353.81 6811.31,5375.46 ; C44.2@6871.85,3436.47 6815.85,3407.85 ; C45.2@6873.32,3016.86 6873.32,2996.32 6840.3,2963.3 ; C37.2@6873.32,3232.86 6826.75,3186.3 6679.3,3186.3 ; C44.2@6873.32,3443.86 6851.86,3443.86 6811.3,3403.3 6707.29,3403.3 ; C36.2@6873.32,3643.86 6873.32,3601.32 ; C50.2@6873.32,5133.93 6873.32,5156.27 6855.3,5174.3 ; C64.2@6873.32,5345.93 6840.84,5345.93 ; C37.2@6873.49,3226.75 6828.48,3188.03 ; C25.2@6873.49,4628.1 6828.48,4666.82 ; C78.2@6873.49,4811.87 6840.63,4785.3 ; C78.2@6873.49,4811.88 6828.48,4773.15 ; C64.2@6873.57,5363.5 6811.31,5375.46 ; C60.2@6873.78,3957.55 6919.37,3989.04 ; C45.2@6874.84,3012.48 6841.58,2964.58 ; C57.2@6875.16,4157.7 6845.18,4106.18 ; C50.2@6875.37,5137.24 6855.3,5174.3 ; C44.2@6875.7,3427.18 6815.85,3407.85 ; C51.2@6876.15,4348.9 6831.96,4325 ; C78.2@6878.86,4803.3 6840.63,4785.3 ; C60.2@6879.22,3950.86 6919.37,3989.04 ; C78.2@6879.22,4817.99 6932.84,4817.99 ; C37.2@6879.38,3218.6 6828.48,3188.03 ; C25.2@6879.38,4636.25 6828.48,4666.82 ; C78.2@6879.38,4803.72 6828.48,4773.15 ; C78.2@6879.91,4809.39 6932.84,4817.99 ; C78.2@6879.91,4826.58 6932.84,4817.99 ; Q2.2@6880.15,2449.89 6868.7,2449.89 6806.61,2511.98 6723.82,2511.98 6719.55,2507.71 ; C36.2@6881.89,3642.99 6873.32,3601.32 ; C78.2@6882.45,4799.65 6932.84,4817.99 ; C78.2@6882.45,4836.33 6932.84,4817.99 ; C45.2@6882.58,3006.05 6841.58,2964.58 ; C57.2@6883.39,4151.93 6845.18,4106.18 ; C50.2@6883.62,5143.09 6855.3,5174.3 ; C60.2@6885.63,3945.09 6919.37,3989.04 ; C36.2@6891.49,3639.79 6873.32,3601.32 ; C60.2@6894.14,3939.72 6919.37,3989.04 ; C65.2@6960.13,2811.39 7017.78,2795.81 ; C65.2@6963.56,2820.84 7017.78,2795.81 ; C65.2@6967.73,2828.39 7017.78,2795.81 ; C65.2@6967.73,2834.3 6979.3,2834.3 7082.66,2730.93 J9.2@7162.52,2730.93 7236.66,2730.93 ; C77.2@6969.19,4799.65 6918.8,4817.99 ; C77.2@6969.19,4836.33 6918.8,4817.99 ; C77.2@6971.73,4809.39 6918.8,4817.99 ; C77.2@6971.73,4826.58 6918.8,4817.99 ; C77.2@6972.42,4817.99 6918.8,4817.99 ; C65.2@6972.94,2835.26 7017.78,2795.81 ; C65.2@6980.2,2842.22 7017.78,2795.81 ; C77.2@6984.23,4817.99 7037.86,4817.99 ; C77.2@6984.93,4809.39 7037.86,4817.99 ; C77.2@6984.93,4826.58 7037.86,4817.99 ; C77.2@6987.47,4799.65 7037.86,4817.99 ; C77.2@6987.47,4836.33 7037.86,4817.99 ; J10.3@7125.5,4748.53 7102.84,4757.16 ; J10.3@7125.5,4765.8 7102.84,4757.16 ; J9.2@7126.21,2722.2 7083.31,2730.93 ; J9.2@7126.21,2739.67 7083.31,2730.93 ; J16.6@7126.21,4048.92 7083.31,4057.66 ; J16.6@7126.21,4066.39 7083.31,4057.66 ; J9.2@7127.09,2730.93 7083.31,2730.93 ; J16.6@7127.09,4057.66 7083.31,4057.66 ; J10.3@7127.09,4757.16 7102.84,4757.16 ; J4.9@7153.79,3195.19 7162.52,3152.3 J4.9@7171.26,3195.19 ; J7.1@7157.54,5395.18 7109.01,5433.99 ; J9.4@7162.52,2612.82 7221,2612.82 ; J4.9@7162.52,3196.07 7162.52,3080.52 7045.3,2963.3 ; J16.6@7162.52,4057.66 7082.91,4057.66 7014.3,3989.04 6919.37,3989.04 ; J7.1@7166.44,5410.26 7109.01,5433.99 ; J10.3@7192.79,4764.26 7236.95,4790.95 ; J9.4@7197.96,2612.82 7221,2612.82 ; J9.2@7197.96,2730.93 7236.66,2730.93 ; J10.3@7197.96,4757.16 7236.95,4790.95 ; J9.2@7198.95,2722.21 7236.66,2730.93 ; J9.2@7198.95,2739.66 7236.66,2730.93 ; J9.4@7199.63,2604.2 7221,2612.82 ; J9.4@7199.63,2621.44 7221,2612.82 ; J10.3@7204.25,4751.04 7236.95,4790.95 ; -197.22,4816.22 -197.22,4918.78 -111.93,5004.07 J8.1@-111.93,5166.19 -107.12,5161.37 177.09,5161.37 ; -185.01,2789.99 -193,2782 -193,2717 -177,2701 57,2701 ; 37.8,4764.67 v1(84,4767) ; 37.8,4764.67 C67.2@82.42,4776.87 ; 37.8,4764.67 C67.2@83.42,4757.02 ; 37.8,4764.67 v1(84,4767) ; 37.8,4764.67 C67.2@82.42,4776.87 ; 37.8,4764.67 C67.2@83.42,4757.02 ; 37.8,4764.67 v1(84,4767) ; 37.8,4764.67 C67.2@82.42,4776.87 ; 37.8,4764.67 C67.2@83.42,4757.02 ; 37.8,4764.67 C67.2@88.19,4783 ; 37.8,4764.67 C67.2@88.19,4746.33 ; 38.58,4764.79 v1(84,4767) ; 38.58,4764.79 C67.2@82.42,4776.87 ; 38.89,4764.67 v1(84,4767) ; 38.89,4764.67 82.38,4776.87 38.94,4764.67 ; 38.89,4764.67 C67.2@83.41,4757.02 ; 38.94,4764.67 v1(84,4767) ; 38.94,4764.67 C67.2@83.41,4757.02 ; 57,2701 v1(94,2730) ; 57,2701 C30.2@87.03,2737.17 ; 57,2701 C30.2@99.3,2721.52 ; 57,2701 v1(94,2730) ; 57,2701 C30.2@87.03,2737.17 ; 57,2701 C30.2@99.3,2721.52 ; 57,2701 v1(94,2730) ; 57,2701 C30.2@87.03,2737.17 ; 57,2701 C30.2@99.3,2721.52 ; 57,2701 v1(94,2730) ; 57,2701 C30.2@87.03,2737.17 ; 57,2701 C30.2@99.3,2721.52 ; 57,2701 v1(94,2730) ; 57,2701 C30.2@87.03,2737.17 ; 57,2701 C30.2@99.3,2721.52 ; 57,2701 C30.2@99.85,2712.31 ; 60.6,4315.6 v1(97.33,4315.6) ; 60.6,4315.6 C58.2@95.96,4325.51 ; 60.6,4315.6 C58.2@95.96,4305.7 ; 60.6,4315.6 v1(97.33,4315.6) ; 60.6,4315.6 C58.2@95.96,4325.51 ; 60.6,4315.6 C58.2@95.96,4305.7 ; 60.6,4315.6 v1(97.33,4315.6) ; 60.6,4315.6 C58.2@95.96,4325.51 ; 60.6,4315.6 C58.2@95.96,4305.7 ; 60.6,4315.6 v1(97.33,4315.6) ; 60.6,4315.6 C58.2@95.96,4325.51 ; 60.6,4315.6 C58.2@95.96,4305.7 ; 60.6,4315.6 v1(97.33,4315.6) ; v1(84,4767) 129.97,4764.67 ; v1(84,4767) C67.2@103.23,4764.67 ; v1(84,4767) 129.11,4764.67 ; v1(84,4767) C67.2@88.19,4783 ; v1(84,4767) C67.2@88.19,4746.33 ; C28.2@90.94,2492.72 131,2466 ; C28.2@90.94,2492.72 131,2466 ; C28.2@90.94,2492.72 131,2466 ; C28.2@90.94,2492.72 131,2466 ; C28.2@90.94,2492.72 131,2466 ; v1(94,2730) C30.2@99.85,2712.31 ; v1(94,2730) 134.39,2702.76 ; v1(94,2730) C30.2@116.08,2728.92 ; v1(94,2730) C30.2@94.75,2712.34 ; v1(94,2730) 135.47,2699.06 ; v1(94,2730) 135.67,2705.2 ; v1(94,2730) 139.91,2704.91 ; C30.2@94.75,2712.34 151,2694 ; v1(97.33,2500.42) 131,2466 ; v1(97.33,2500.42) 131,2466 ; v1(97.33,2500.42) 131,2466 ; v1(97.33,2500.42) 131,2466 ; v1(97.33,2500.42) 131,2466 ; v1(97.33,2500.42) 97.33,2499.67 131,2466 ; v1(97.33,4315.6) 119.86,4357.43 ; v1(97.33,4315.6) 120.82,4361.44 ; v1(97.33,4315.6) 121.54,4356.93 ; v1(97.33,4315.6) 124.06,4359.8 ; C67.2@103.23,4764.67 156.85,4764.67 ; C28.2@105.16,2506.63 131,2466 ; C28.2@105.16,2506.63 131,2466 ; C28.2@105.16,2506.63 131,2466 ; C28.2@105.16,2506.63 131,2466 ; C28.2@105.16,2506.63 131,2466 ; C30.2@116.08,2728.92 151,2694 ; 129.11,4764.67 84.59,4757.02 129.97,4764.67 ; 131,2466 279.56,2466 ; 141.99,4102.6 174.67,4135.29 240.56,4135.29 273.25,4102.6 ; 151,2694 238.33,2694 273.25,2728.92 ; 161.53,3772.55 378.18,3772.55 ; 161.53,3772.55 v1(203.65,3814.67) ; 164.34,3777.08 v1(203.65,3814.67) ; 166.22,3775.26 v1(203.65,3814.67) ; 166.75,3778.62 v1(203.65,3814.67) ; 167.59,3777.71 v1(203.65,3814.67) ; C24.2@187.31,4883.69 v1(205.65,4886.93) ; C24.2@187.31,4883.69 205.65,4833.3 ; C46.2@197.69,3352.25 v1(200,3368) ; C46.2@197.69,3352.25 245.25,3325 ; v1(200,3368) 238.18,3333.24 ; v1(200,3368) 236.52,3332.42 ; v1(200,3368) C46.2@216.52,3371.69 ; v1(200,3368) 240.87,3332.13 ; v1(200,3368) 236.99,3333.26 ; v1(200,3368) 237.54,3329.42 ; C39.2@200.02,3583.67 v1(201,3601) ; C39.2@200.02,3583.67 258.13,3559.87 ; v1(201,3601) 241.62,3573.4 ; v1(201,3601) 245.7,3573.29 ; v1(201,3601) C39.2@218.33,3599.67 ; v1(201,3601) 244.44,3573.56 ; v1(201,3601) 240.13,3570.88 ; v1(201,3601) 241.07,3566.85 ; 204.54,4840.15 v1(205.65,4886.93) ; C69.2@205.65,4764.67 v1(205.65,4886.93) ; 205.65,4833.3 v1(205.65,4886.93) ; 205.65,4833.3 195.69,4885.99 205.65,4833.3 ; 205.65,4833.3 215.61,4885.99 205.65,4833.3 ; 205.65,4833.3 v1(205.65,4886.93) ; 205.65,4833.3 v1(205.65,4886.93) ; 205.65,4833.3 C24.2@223.99,4883.69 ; 205.65,4841.93 v1(205.65,4886.93) ; 205.65,4841.93 195.71,4885.81 205.65,4841.93 ; 205.65,4841.93 215.59,4885.81 205.65,4841.93 ; 205.65,4841.93 v1(205.65,4886.93) ; v1(205.65,4886.93) 242.72,4851.03 ; v1(205.65,4886.93) 241.55,4849.78 ; v1(205.65,4886.93) 245.58,4849.75 ; v1(205.65,4886.93) 206.76,4840.15 ; v1(205.65,4886.93) C24.2@223.99,4883.69 ; v1(205.65,4886.93) 242.62,4846.82 ; C59.2@205.83,5401.56 250.33,5422.61 ; C59.2@205.84,5401.56 250.03,5422.36 ; C59.2@205.83,5401.56 250.33,5422.61 ; C59.2@205.83,5401.56 250.33,5422.61 ; v1(211,5393) 250.33,5422.61 ; v1(211,5393) 250.03,5422.36 ; v1(211,5393) 250.33,5422.61 ; v1(211,5393) 250.33,5422.61 ; C46.2@216.52,3371.69 245.25,3325 ; C59.2@217.79,5385.66 250.33,5422.61 ; C59.2@217.8,5385.67 250.03,5422.36 ; C59.2@217.79,5385.66 250.33,5422.61 ; C59.2@217.79,5385.66 250.33,5422.61 ; C39.2@218.33,3599.67 259,3559 379.63,3559 ; 245.25,3325 382,3325 ; 250.33,5422.61 380.39,5422.61 ; 269.14,4360.44 C55.2@292.26,4305.75 ; 270.78,4356.54 v1(309,4317) ; 270.78,4356.54 315.53,4324.57 272.92,4354.53 ; 272.92,4354.53 v1(309,4317) ; 273.25,4102.6 v1(318,4113) ; 273.25,4102.6 C49.2@314.69,4122.44 ; 273.25,4102.6 C49.2@319.19,4103.07 ; 273.25,4102.6 v1(318,4113) ; 273.25,4102.6 C49.2@314.69,4122.44 ; 273.25,4102.6 C49.2@319.19,4103.07 ; 273.25,4102.6 v1(318,4113) ; 273.25,4102.6 C49.2@314.69,4122.44 ; 273.25,4102.6 C49.2@319.19,4103.07 ; 273.41,4357.87 v1(309,4317) ; 273.73,4102.72 v1(318,4113) ; 273.73,4102.72 C49.2@314.68,4122.43 ; 273.73,4102.72 C49.2@319.18,4103.07 ; 274.75,4353.98 v1(309,4317) ; 275.06,4354.52 v1(309,4317) ; 275.09,4355.32 v1(309,4317) ; C55.2@292.26,4305.75 v1(309,4317) ; 383.5,4840.5 C26.2@399.58,4895.93 ; 385.43,4847.17 v1(418,4889) ; 387.62,4848.89 v1(418,4889) ; 388.22,4844.02 v1(418,4889) ; 388.22,4844.02 409.19,4893.72 390.23,4847.64 ; 389.52,4846.52 v1(418,4889) ; 389.83,4849.62 v1(418,4889) ; 390.23,4847.64 v1(418,4889) ; C26.2@399.58,4895.93 v1(418,4889) ; v1(1427,4592) C102.2@1472.29,4589.29 ; v1(1427,4592) C102.2@1472.47,4600.71 ; v1(1427,4592) C102.2@1470.65,4578.43 ; v1(1427,4592) C102.2@1472.17,4589.29 ; v1(1427,4592) 1429.71,4589.29 C102.2@1486.77,4589.29 1529.23,4631.76 U5.49@1819.15,4631.76 2321.07,4631.76 2338.83,4614 ; 1429.61,5329.92 v1(1479.3,5329.92) ; 1429.9,5329.84 v1(1479.3,5329.92) ; 1429.9,5330.01 v1(1479.3,5329.92) ; 1434.3,5329.92 v1(1479.3,5329.92) ; 1434.3,5329.92 1478.18,5339.86 1434.3,5329.92 ; 1434.3,5329.92 1478.18,5319.99 1434.3,5329.92 ; 1434.3,5329.92 v1(1479.3,5329.92) ; C102.2@1472.17,4589.29 1427.51,4582.01 C102.2@1472.29,4589.29 ; C102.2@1472.17,4589.29 1428.7,4601.85 C102.2@1472.29,4589.29 ; 1479.3,5238.12 C97.2@1481.86,5188.3 ; 1479.3,5278.27 v1(1479.3,5329.92) ; 1479.3,5278.27 1469.34,5328.96 1479.3,5278.27 ; 1479.3,5278.27 1489.25,5328.96 1479.3,5278.27 ; 1479.3,5278.27 v1(1479.3,5329.92) ; 1479.3,5284.92 v1(1479.3,5329.92) ; 1479.3,5284.92 1469.36,5328.81 1479.3,5284.92 ; 1479.3,5284.92 1489.23,5328.81 1479.3,5284.92 ; 1479.3,5284.92 v1(1479.3,5329.92) ; v1(1479.3,5329.92) 1479.3,5190.86 C97.2@1481.86,5188.3 ; 1481.86,5148.98 C104.2@1481.77,5099.29 1481.86,5099.39 C97.2@1481.86,5188.3 ; 1601.72,5604.6 1652.36,5598.7 1702.91,5604.6 ; 1686.69,5604.6 C94.2@1738.3,5596.73 ; C94.2@1738.3,5596.73 1809.16,5525.86 C93.1@1821.29,5525.86 1985.76,5525.86 Y1.2@1988.87,5528.97 ; 1771.61,5329.92 C103.1@1821.3,5329.92 1878.92,5329.92 v1(1880,5331) ; C103.1@1834.98,5329.92 v1(1880,5331) ; C103.1@1835.05,5340.91 v1(1880,5331) ; C103.1@1835.86,5319.19 v1(1880,5331) ; 1929.22,5525.86 Y1.2@1988.87,5528.97 ; 1937.56,5064.83 v7(1984.5,5073.3) ; 1946.34,5495.34 1979.97,5528.97 Y1.2@1988.87,5528.97 ; 1946.34,5495.34 1946.34,5312.66 1984.5,5274.5 U5.20@1984.5,5151.44 v7(1984.5,5073.3) ; 1984.5,4995.5 v1(1997,4979) 1997,4983 1984.5,4995.5 ; 1984.5,4995.5 v7@1984.5,5065.5 ; 1984.5,5028.3 v7(1984.5,5073.3) ; v7@1984.5,5065.5 2004.19,5085.19 ; v7(1984.5,5073.3) U5.20@1984.5,5112.19 ; v7(1984.5,5073.3) 2004.19,5085.19 ; 2181.35,5078 v1(2197,5066) ; 2181.35,5078 v1@2200.87,5075.22 ; 2181.35,5078 v1@2189.1,5059.87 ; 2181.35,5078 v1(2197,5066) ; 2181.35,5078 v1@2200.87,5075.22 ; 2181.35,5078 v1@2189.1,5059.87 ; 2181.35,5078 v1(2197,5066) ; 2181.35,5078 v1@2200.87,5075.22 ; 2181.35,5078 v1@2189.1,5059.87 ; 2181.35,5078 U5.10@2181.35,5151.44 2181.35,5264.35 2235,5318 2235,5413.43 R99.1@2312.3,5490.73 ; v1(2197,5066) 2242.04,5064.83 ; R99.1@2312.3,5490.73 2362.01,5489.43 ; 2335.32,4354.88 2335.32,4412.47 2338.83,4415.99 U5.74@2338.83,4545.15 2338.83,4614 ; 2335.32,4354.88 2368,4322.2 C100.2@2368,4314.57 2368,4267 ; 2702.6,5064.83 v1(2751,5076) ; C98.2@2741.05,5117.7 v1(2751,5076) ; C98.2@2741.05,5117.7 v1@2745,5082 ; v1@2742.73,5081.63 2757.63,5094.63 ; v1@2742.73,5081.63 2757.63,5094.63 ; v1@2742.73,5081.63 2757.63,5094.63 ; v1@2742.73,5081.63 2757.63,5094.63 ; C98.2@2743.82,5111.32 v1(2751,5076) ; C98.2@2743.82,5111.32 2757.63,5094.63 ; v1@2745,5082 C98.2@2755.67,5116.29 ; v1@2745,5082 C98.2@2768.5,5109.16 ; v1@2745,5082 2757.63,5094.63 ; v1(2751,5076) C98.2@2755.67,5116.29 ; v1(2751,5076) 2757.63,5094.63 ; v1(2751,5076) C98.2@2757.63,5116.29 ; v1(2751,5076) C98.2@2768.5,5109.16 ; v1(2751,5076) 2757.63,5094.63 ; v1(2751,5076) 2757.63,5094.63 ; v1(2751,5076) C98.2@2771.45,5111.32 ; v1(2751,5076) 2757.63,5094.63 ; 2757.63,5094.63 v1@2760.96,5075.14 ; 2757.63,5094.63 v1@2760.96,5075.14 ; 2757.63,5094.63 v1@2760.96,5075.14 ; 2757.63,5094.63 v1@2760.96,5075.14 ; 2757.63,5094.63 C98.2@2757.63,5116.29 ; 2757.63,5094.63 C98.2@2771.45,5111.32 ; 4556.55,4544.55 4870.04,4544.55 ; 4730.3,5069.3 4713,5052 4713,4691 4751,4653 4897,4653 4917,4633 4917,4553 ; 4730.3,5069.3 IC1.15@4781.66,5069.3 4844.7,5069.3 ; 4870.04,4544.55 C111.2@4873.29,4511.86 4875.86,4511.86 C111.2@4889.3,4525.3 ; 4870.04,4544.55 C111.2@4889.3,4525.3 ; C111.2@4889.3,4525.3 4917,4553 ; 6552.55,4956.45 6580,4929 6580,4868 6630.01,4817.99 ; 6599.49,4848.51 C23.2@6657.39,4817.99 ; 6600,5304 6642.93,5346.93 C66.2@6663.3,5346.93 6670.93,5346.93 6707.55,5383.55 ; 6600,5304 6600,5158 6618.07,5139.93 ; 6600,5304 6600,5448 6651,5499 7044,5499 7140.59,5402.41 J7.1@7162.52,5402.41 7109.01,5433.99 ; 6618.07,5139.93 C71.2@6663.3,5139.93 ; 6620.77,3189.23 C33.2@6657.39,3232.86 ; 6620.77,3189.23 6620.77,3401.33 ; 6620.77,3189.23 6620.77,3066.6 6646.3,3041.06 ; 6620.77,3189.23 C33.2@6658.3,3226.76 ; 6620.77,3401.33 C40.2@6663.3,3443.86 6666.73,3443.86 6707.29,3403.3 ; 6620.77,3401.33 6620.77,3601.33 ; 6620.77,3601.33 6620.77,4118.96 ; 6620.77,4118.96 C54.2@6663.3,4161.49 6663.3,4125.29 ; 6620.77,4323.83 C48.2@6660.3,4363.36 6660.3,4351.7 6687,4325 ; 6630.01,4817.99 C23.2@6657.39,4817.99 ; 6630.01,4817.99 6656.03,4826.5 6630.01,4817.99 ; 6630.01,4817.99 6656.03,4809.47 6630.01,4817.99 ; 6630.01,4817.99 6651.06,4835.5 6630.01,4817.99 ; 6630.01,4817.99 6651.06,4800.48 6630.01,4817.99 ; 6630.01,4817.99 C23.2@6657.39,4817.99 ; 6630.01,4817.99 C23.2@6663.3,4817.99 6695.98,4785.3 ; 6646.3,2958.8 C41.2@6663.3,3016.86 6716.86,2963.3 6840.3,2963.3 ; 6646.3,3041.06 6657.39,3016.86 6646.3,3041.06 ; 6646.3,3041.06 6664.55,3021.67 6646.3,3041.06 ; 6646.3,3041.06 6649.08,3014.59 6646.3,3041.06 ; 6646.3,3041.06 6670.54,3030.05 6646.3,3041.06 ; 6646.3,3041.06 6638.82,3015.52 6646.3,3041.06 ; 6646.3,3041.06 6646.3,2799.35 6678.99,2766.67 ; C33.2@6657.39,3232.86 6658.3,3207.3 ; C33.2@6657.39,3232.86 6658.3,3207.3 ; 6658.3,3207.3 6648.95,3231.11 6658.3,3207.3 ; 6658.3,3207.3 6665.94,3231.71 6658.3,3207.3 ; 6658.3,3207.3 6640.3,3225.48 6658.3,3207.3 ; 6658.3,3207.3 6674.97,3226.7 6658.3,3207.3 ; 6658.3,3207.3 C33.2@6658.3,3226.76 ; 6658.3,3207.3 6679.3,3186.3 ; 6663.3,4125.29 6691.3,4097.3 6836.3,4097.3 ; C71.2@6663.3,5139.93 6696.92,5173.55 ; C71.2@6663.3,5139.93 6663.3,5139.7 6743,5060 7151,5060 7239,4972 7239,4793 7203.16,4757.16 J10.3@7162.52,4757.16 7102.84,4757.16 ; 6668.3,3606.3 6686.3,3588.3 6860.3,3588.3 6873.32,3601.32 ; 6678.99,2698.42 C63.2@6678.99,2722.39 ; 6678.99,2698.42 6670.51,2720.84 6678.99,2698.42 ; 6678.99,2698.42 6687.47,2720.84 6678.99,2698.42 ; 6678.99,2698.42 6661.83,2715.16 6678.99,2698.42 ; 6678.99,2698.42 6696.15,2715.16 6678.99,2698.42 ; 6678.99,2698.42 C63.2@6678.99,2722.39 ; 6678.99,2698.42 C63.2@6678.99,2728.3 6678.99,2766.67 ; 6678.99,2698.42 6719.55,2657.86 6719.55,2507.71 ; C63.2@6678.99,2722.39 6710.09,2667.31 ; 6687,4325 6831.96,4325 ; 6695.98,4785.3 6840.63,4785.3 ; 6696.92,5173.55 6669.2,5139.93 6707.99,5095.01 ; 6696.92,5173.55 6854.55,5173.55 6855.3,5174.3 ; 6707.55,5383.55 6803.22,5383.55 6840.84,5345.93 ; 6811.31,5375.46 C64.2@6867.41,5345.93 ; 6813.79,4621.99 6867.41,4621.99 6828.48,4666.82 ; 6828.48,4773.15 6867.41,4817.99 6840.63,4785.3 ; 6836.3,4097.3 6873.32,4134.32 ; 6836.3,4097.3 6810.3,4071.3 6810.3,3971.3 6838.6,3942.99 ; 6838.6,3942.99 6873.32,3942.99 6919.37,3989.04 ; 6840.3,2963.3 7045.3,2963.3 ; 6840.63,4785.3 C78.2@6873.32,4817.99 ; 6840.84,5345.93 C64.2@6867.41,5345.93 ; 6840.84,5345.93 6866.01,5354.43 6840.84,5345.93 ; 6840.84,5345.93 6866.01,5337.42 6840.84,5345.93 ; 6840.84,5345.93 6860.89,5363.37 6840.84,5345.93 ; 6840.84,5345.93 6860.89,5328.48 6840.84,5345.93 ; 6840.84,5345.93 C64.2@6867.41,5345.93 ; 6873.32,4134.32 6864.8,4160.12 6873.32,4134.32 ; 6873.32,4134.32 6881.83,4160.12 6873.32,4134.32 ; 6873.32,4134.32 6855.82,4155.11 6873.32,4134.32 ; 6873.32,4134.32 6890.81,4155.11 6873.32,4134.32 ; 6873.32,4134.32 C57.2@6873.32,4161.49 6873.32,4134.32 ; C78.2@6873.32,4817.99 C77.2@6978.33,4817.99 7042.01,4817.99 7102.84,4757.16 ; 7045.3,2963.3 7160.7,2963.3 7236.66,2887.34 7236.66,2730.93 ; 7221,2612.82 7236.66,2628.48 7236.66,2730.93
  Top Layer w20: J18.26@3250.03,5616.24 3300,5585.41 ; J18.26@3258.48,5626.93 3300,5585.41 ; J18.26@3269.17,5635.37 3300,5585.41 ; 3408,5591 3383,5566 3383,5439.33 3599,5223.33 v1(3599,5155) ; 3527,5175.4 v1(3521,5099) 3527,5105 3527,5212.12 3379.12,5360 3378,5360 3300,5438 3300,5585.41 ; 5017.02,4678 5017.02,4651.02 ; 5017.02,4721.98 5017.02,4914.39 R113.2@5068.02,4965.39 ; C115.1@5055.38,4691.69 5017.02,4651.02 ; C115.1@5064.08,4681.21 5017.02,4651.02 ; R106.2@5068.01,4483.65 5017.02,4534.64 5017.02,4651.02 ; C115.1@5068.53,4669.74 5129.02,4639.02 ; C115.1@5069.98,4668.93 5017.02,4651.02 ; C115.1@5069.98,4681.21 5047.21,4681.21 5017.02,4651.02 ; C115.1@5069.98,4684.65 5083.39,4684.65 5129.02,4639.02 ; C115.1@5075.89,4681.21 5129.02,4639.02 ; C115.1@5085.39,4690.97 5129.02,4639.02 ; IC4.5@5349.72,4679.05 5349.72,4652.72 ; IC4.5@5349.72,4712.05 5349.72,4652.72 ; C114.1@5454.99,4688.76 5430.03,4639.02 ; C114.1@5466.32,4681.21 5430.03,4639.02 ; C114.1@5468.82,4671.27 5532.42,4621.02 ; R110.2@5472.02,4965.39 5472.02,4963.28 5424.7,4915.97 5424.7,4728.87 5472.23,4681.34 C114.1@5472.23,4681.21 ; R105.2@5474.2,4483.65 5474.2,4485.75 5428.64,4531.31 5428.64,4637.62 5430.03,4639.02 ; C114.1@5475.49,4671.13 5430.03,4639.02 ; C114.1@5478.13,4681.21 5532.42,4621.02 ; C114.1@5488.98,4689.45 5532.42,4621.02 ; IC3.5@5758.22,4679.05 5758.22,4648.22 ; C113.1@5862.56,4690.52 5833.02,4649.02 ; C113.1@5871.39,4667.63 5789.07,4681.21 ; C113.1@5871.39,4694.78 5789.07,4681.21 ; C113.1@5875.06,4671.21 5929.6,4630.02 ; C113.1@5879.62,4669.59 5833.02,4649.02 ; R104.2@5880.38,4483.65 5833.02,4531.01 5833.02,4649.02 ; R107.2@5881.01,4964.39 5825.02,4908.39 5825.02,4734.6 C113.1@5878.41,4681.21 ; C113.1@5884.32,4681.21 5929.6,4630.02 ; C113.1@5895.37,4689.17 5929.6,4630.02 ; IC2.5@6166.72,4745.05 6222.69,4800.69 ; C84.1@6278.74,5006.57 6235,4928.85 ; C84.1@6296.06,4993.85 6235,4928.85 ; C84.1@6303.94,4993.85 6373.3,4993.85 ; C84.1@6307.27,4972.61 6373.3,4993.85 ; C84.1@6307.27,5015.09 6373.3,4993.85 ; C84.1@6309.84,4977.35 6235,4928.85 ; C82.1@6393.26,4949.21 6373.3,4993.85 ; C82.1@6404.8,4956.45 6373.3,4993.85 ; C22.1@6406.82,1591.23 6430,1676 ; C82.1@6413.9,4966.59 6373.3,4993.85 ; C22.1@6414.3,1588.67 6430,1604.37 6430,1676 ; C82.1@6416.61,4956.45 C83.1@6500.23,4956.45 ; C82.1@6417.72,4942.87 C83.1@6500.23,4956.45 ; C82.1@6417.72,4970.02 C83.1@6500.23,4956.45 ; C22.1@6420.2,1588.67 6430,1676 ; C22.1@6433.81,1588.2 6430,1676 ; U4.4@6484.41,4492.05 6510.95,4492.05 6543.23,4459.77 6543.23,4295.01 ; C81.1@6492.65,4259.83 6543.23,4295.01 ; C81.1@6497.8,4249.58 6543.23,4295.01 ; C81.1@6501.61,4249.58 6543.23,4295.01 ; C83.1@6503.67,4943.19 C82.1@6423.69,4969.04 ; C83.1@6503.67,4969.71 C82.1@6423.69,4943.85 ; C83.1@6507.74,4942.86 C82.1@6423.69,4943.85 ; C83.1@6507.74,4970.04 C82.1@6423.69,4969.04 ; C81.1@6512.61,4241.54 6543.23,4295.01 ; C83.1@6512.7,4956.45 C82.1@6410.7,4956.45 6373.3,4993.85 ; 6608.02,1827.42 J12.5@6681.8,1827.42 ; 6608.02,1945.53 J12.3@6681.8,1945.53 ; J12.5@6717.23,1827.42 v1(6571,1827.42) 6494.92,1827.42 6463.5,1796 ; J12.3@6717.23,1945.53 6520.53,1945.53 6463.5,1888.5 6463.5,1796 ; 5129.02,4639.02 5336.02,4639.02 ; 5336.02,4639.02 5430.03,4639.02 ; 5336.02,4639.02 5349.72,4652.72 ; 5430.03,4639.02 C114.1@5472.23,4681.21 ; C114.1@5472.23,4681.21 5532.42,4621.02 ; 5532.42,4621.02 5731.02,4621.02 5758.22,4648.22 ; 5758.22,4648.22 IC3.5@5758.22,4712.05 5789.07,4681.21 ; 5789.07,4681.21 5872.5,4681.21 5833.02,4649.02 ; 5789.07,4681.21 C113.1@5865.21,4681.21 ; 5833.02,4649.02 C113.1@5865.21,4681.21 ; C113.1@5865.21,4681.21 C113.1@5878.41,4681.21 ; C113.1@5878.41,4681.21 5929.6,4630.02 ; 5929.6,4630.02 6137.02,4630.02 ; 6137.02,4630.02 IC2.5@6166.72,4679.05 ; 6137.02,4630.02 6166.72,4659.72 ; 6166.72,4659.72 IC2.5@6166.72,4679.05 ; 6166.72,4659.72 IC2.5@6166.72,4679.05 ; 6166.72,4659.72 IC2.5@6166.72,4712.05 6166.72,4744.72 6235,4813 6235,4928.85 ; 6235,4928.85 C84.1@6300,4993.85 6373.3,4993.85 ; C82.1@6423.18,4956.45 C83.1@6506.8,4956.45 ; C82.1@6423.18,4956.45 6505.69,4970.02 C82.1@6423.18,4956.45 ; C82.1@6423.18,4956.45 6505.69,4942.87 C82.1@6423.18,4956.45 ; C82.1@6423.18,4956.45 C83.1@6506.8,4956.45 ; C82.1@6423.69,4943.85 C83.1@6506.8,4956.45 ; C82.1@6423.69,4969.04 C83.1@6506.8,4956.45 ; 6430,1676 6463.5,1709.5 6463.5,1796
  Top Layer w30: v4(4761,373) 4922,373 5020,471 5026,471 ; D5.1@4978.37,1082.3 4978.37,1128.37 ; 4979.93,520.74 R19.1@4979.93,634.36 ; R19.1@4979.93,638.3 4979.93,517.07 5026,471 ; D5.1@4978.37,1090.17 4978.37,1128.37 ; D5.1@4978.37,1090.17 4999.3,1149.3 ; D5.1@4978.37,1090.17 4978.37,1128.37 ; 4978.37,1128.37 4999.3,1149.3 ; 4999.3,1149.3 5086.3,1149.3 ; 5026,471 5073.88,471 5116,513.12 5116,782.78 5122,788.78 ; 5086.3,1149.3 v1(5137.3,1202.3) ; 5086.3,1149.3 v1(5137.3,1202.3) ; 5086.3,1149.3 Q5.2@5168.11,1203.8 ; 5086.3,1149.3 v1@5137.3,1200.3 ; 5122,788.78 v1(5126.3,866.3) 5122,862 5122,788.78 ; v1@5137.3,1200.3 Q5.2@5168.11,1203.8 ; v1@5137.3,1200.3 Q5.2@5168.11,1203.8 ; v1@5137.3,1200.3 v1(5137.3,1202.3) ; v1(5137.3,1202.3) Q5.2@5168.11,1203.8 ; v1(5137.3,1202.3) Q5.2@5168.11,1203.8 ; v1(5137.3,1202.3) Q5.2@5168.11,1203.8 ; v1(5137.3,1202.3) Q5.2@5168.11,1203.8